# Altium PCB Digital.PcbDoc
Units mil, origin at the board's own origin, x right, y up, seen from the top; angles counter-clockwise.
Board outline 2755 x 2460 mil, 4 copper layers (Top Layer, Power, Ground, Bottom Layer), stack 30.634 mil thick; 74 components, 58 nets, 442 pads, 198 vias.
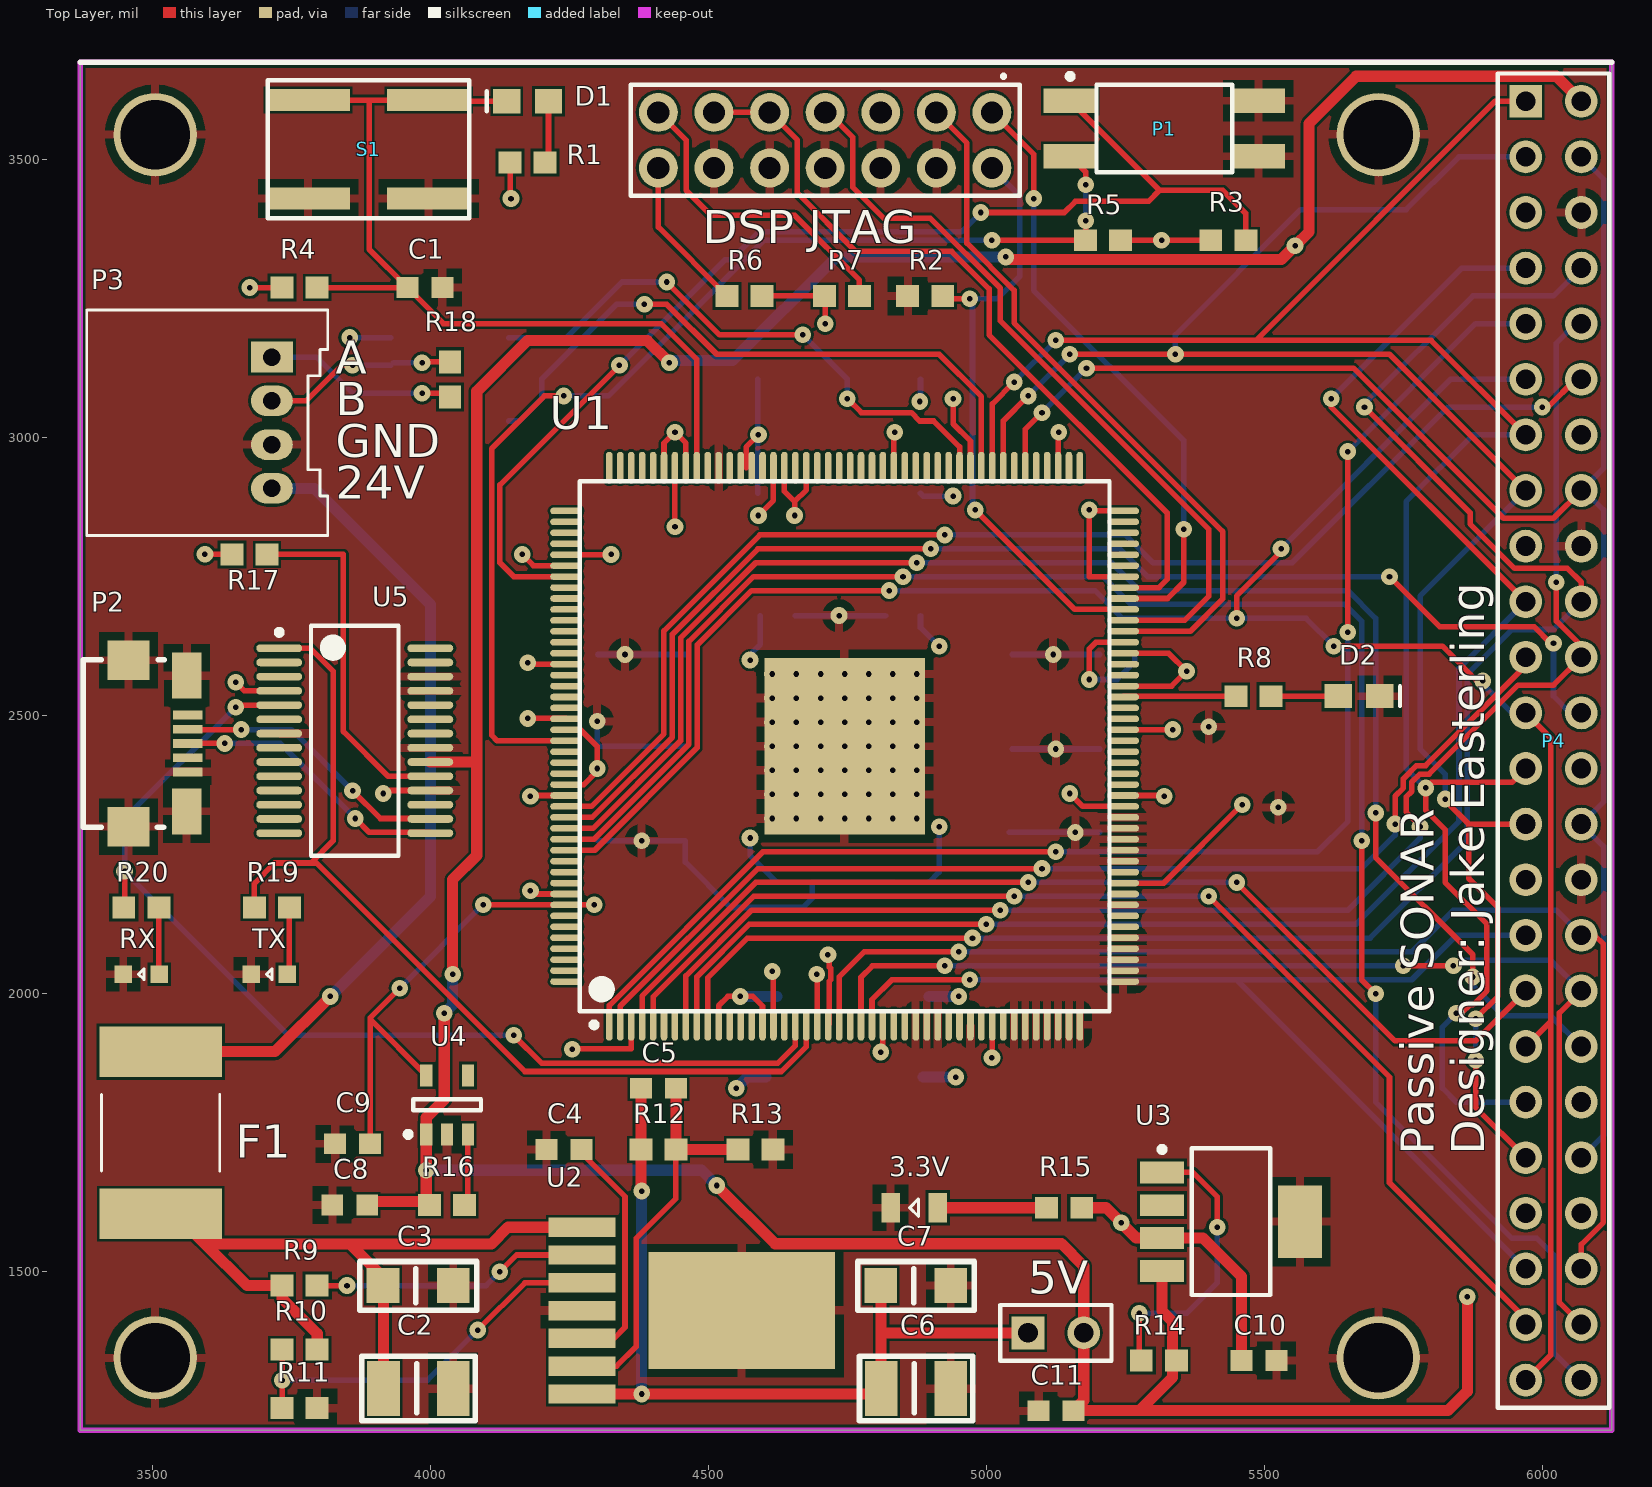
[diagram p0: Top Layer view]
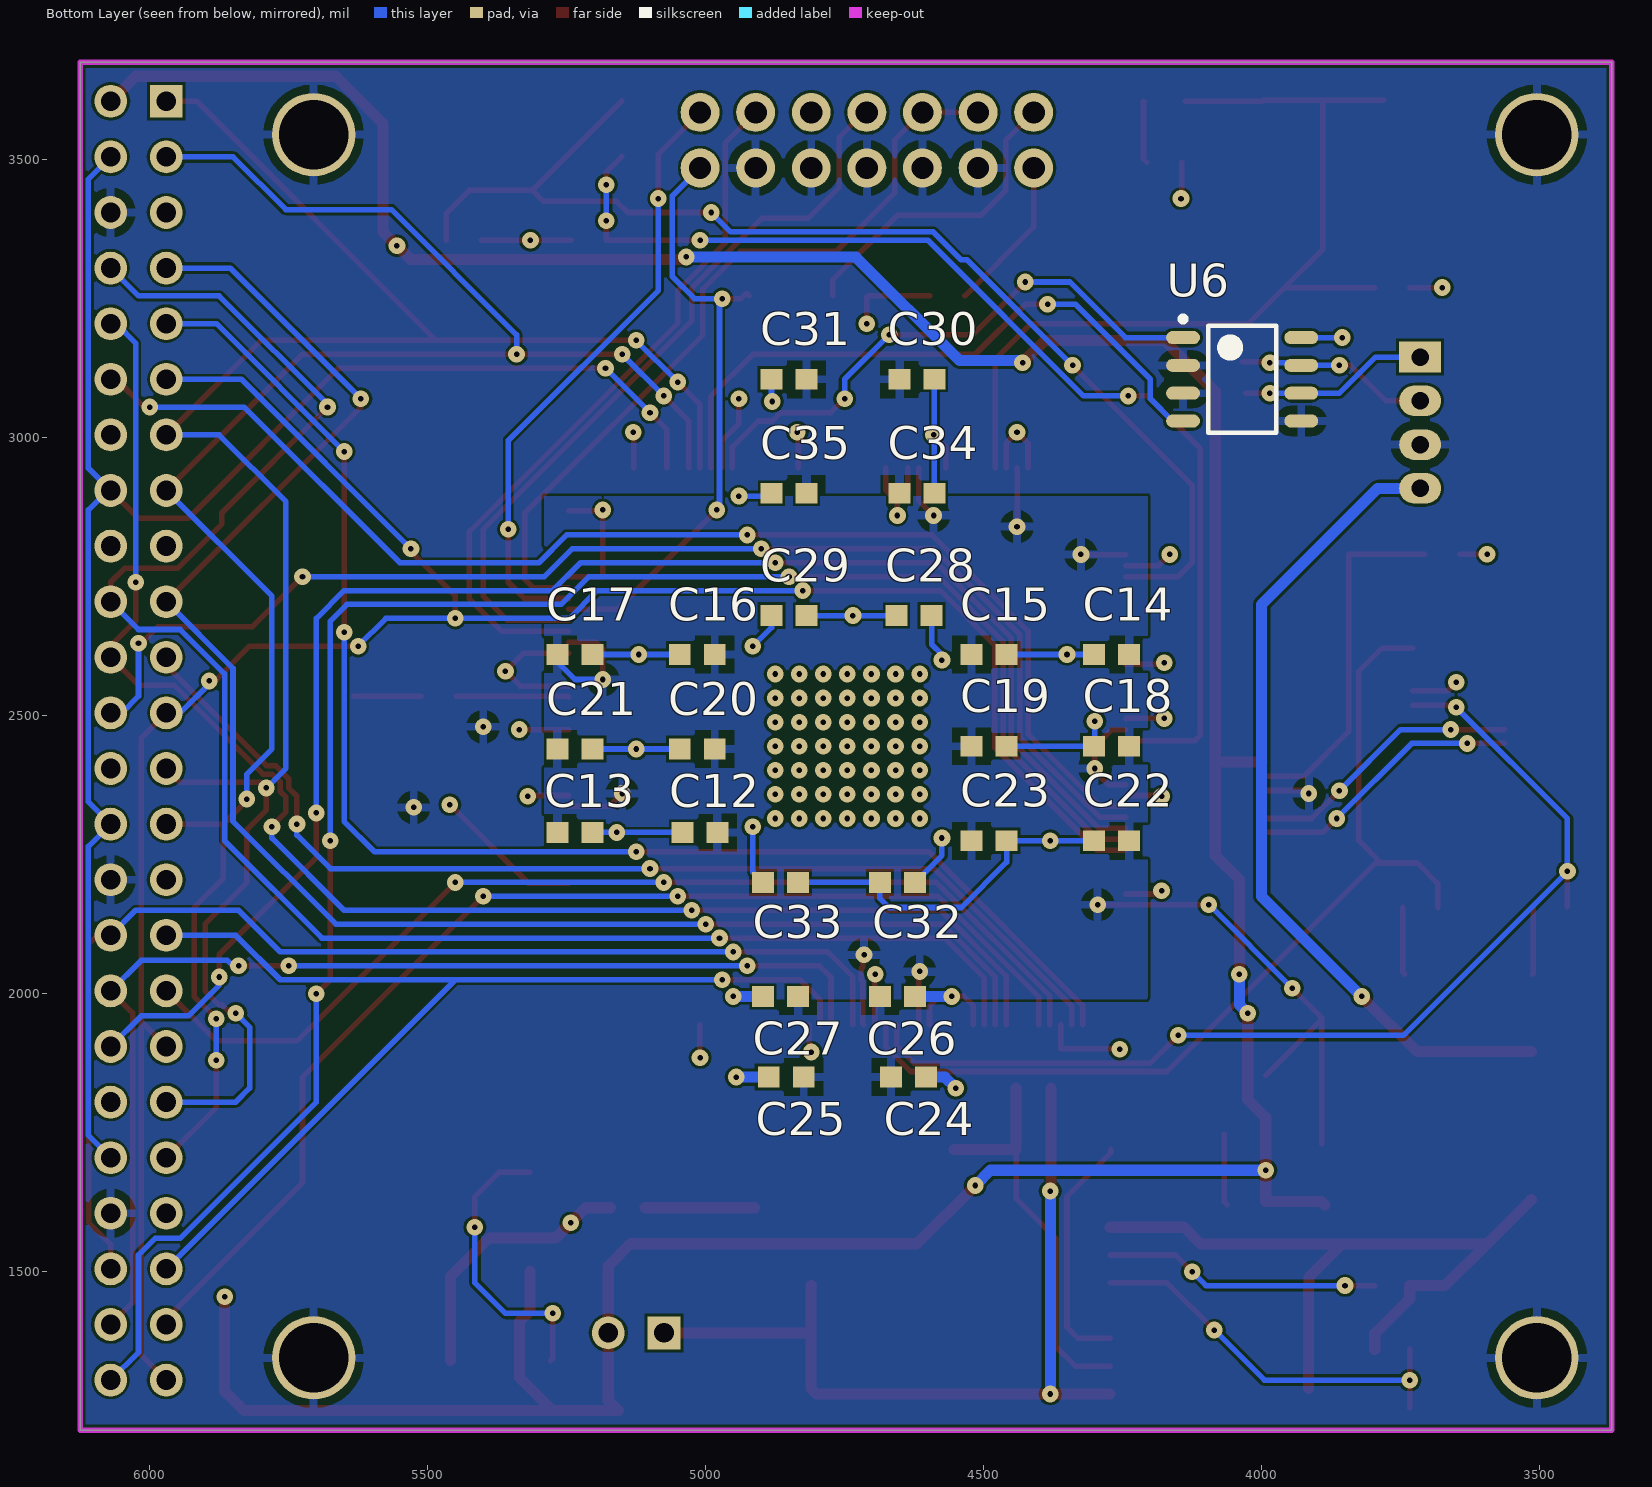
[diagram p1: Bottom Layer view, seen from below]
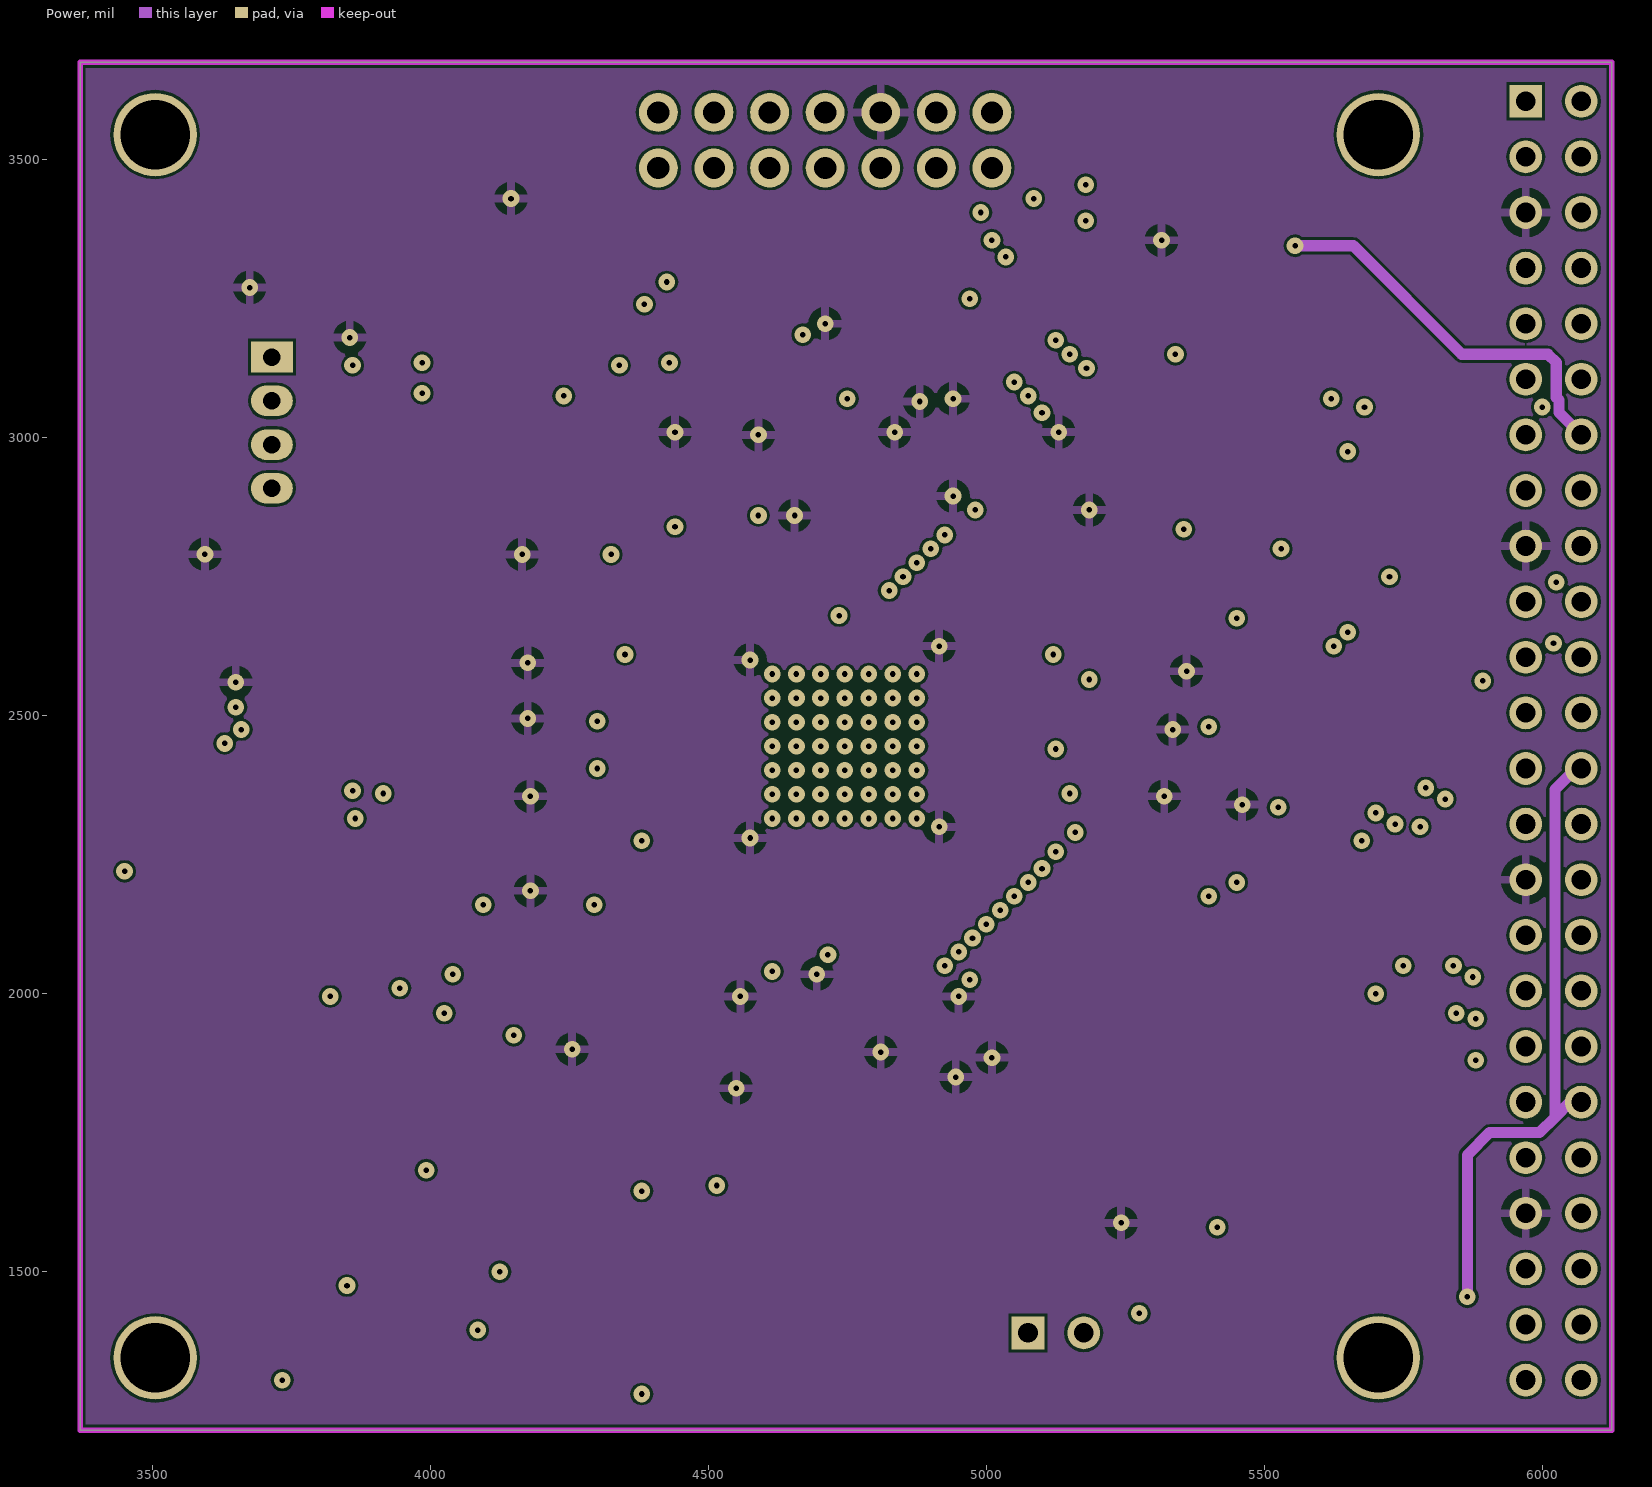
[diagram p2: Power]
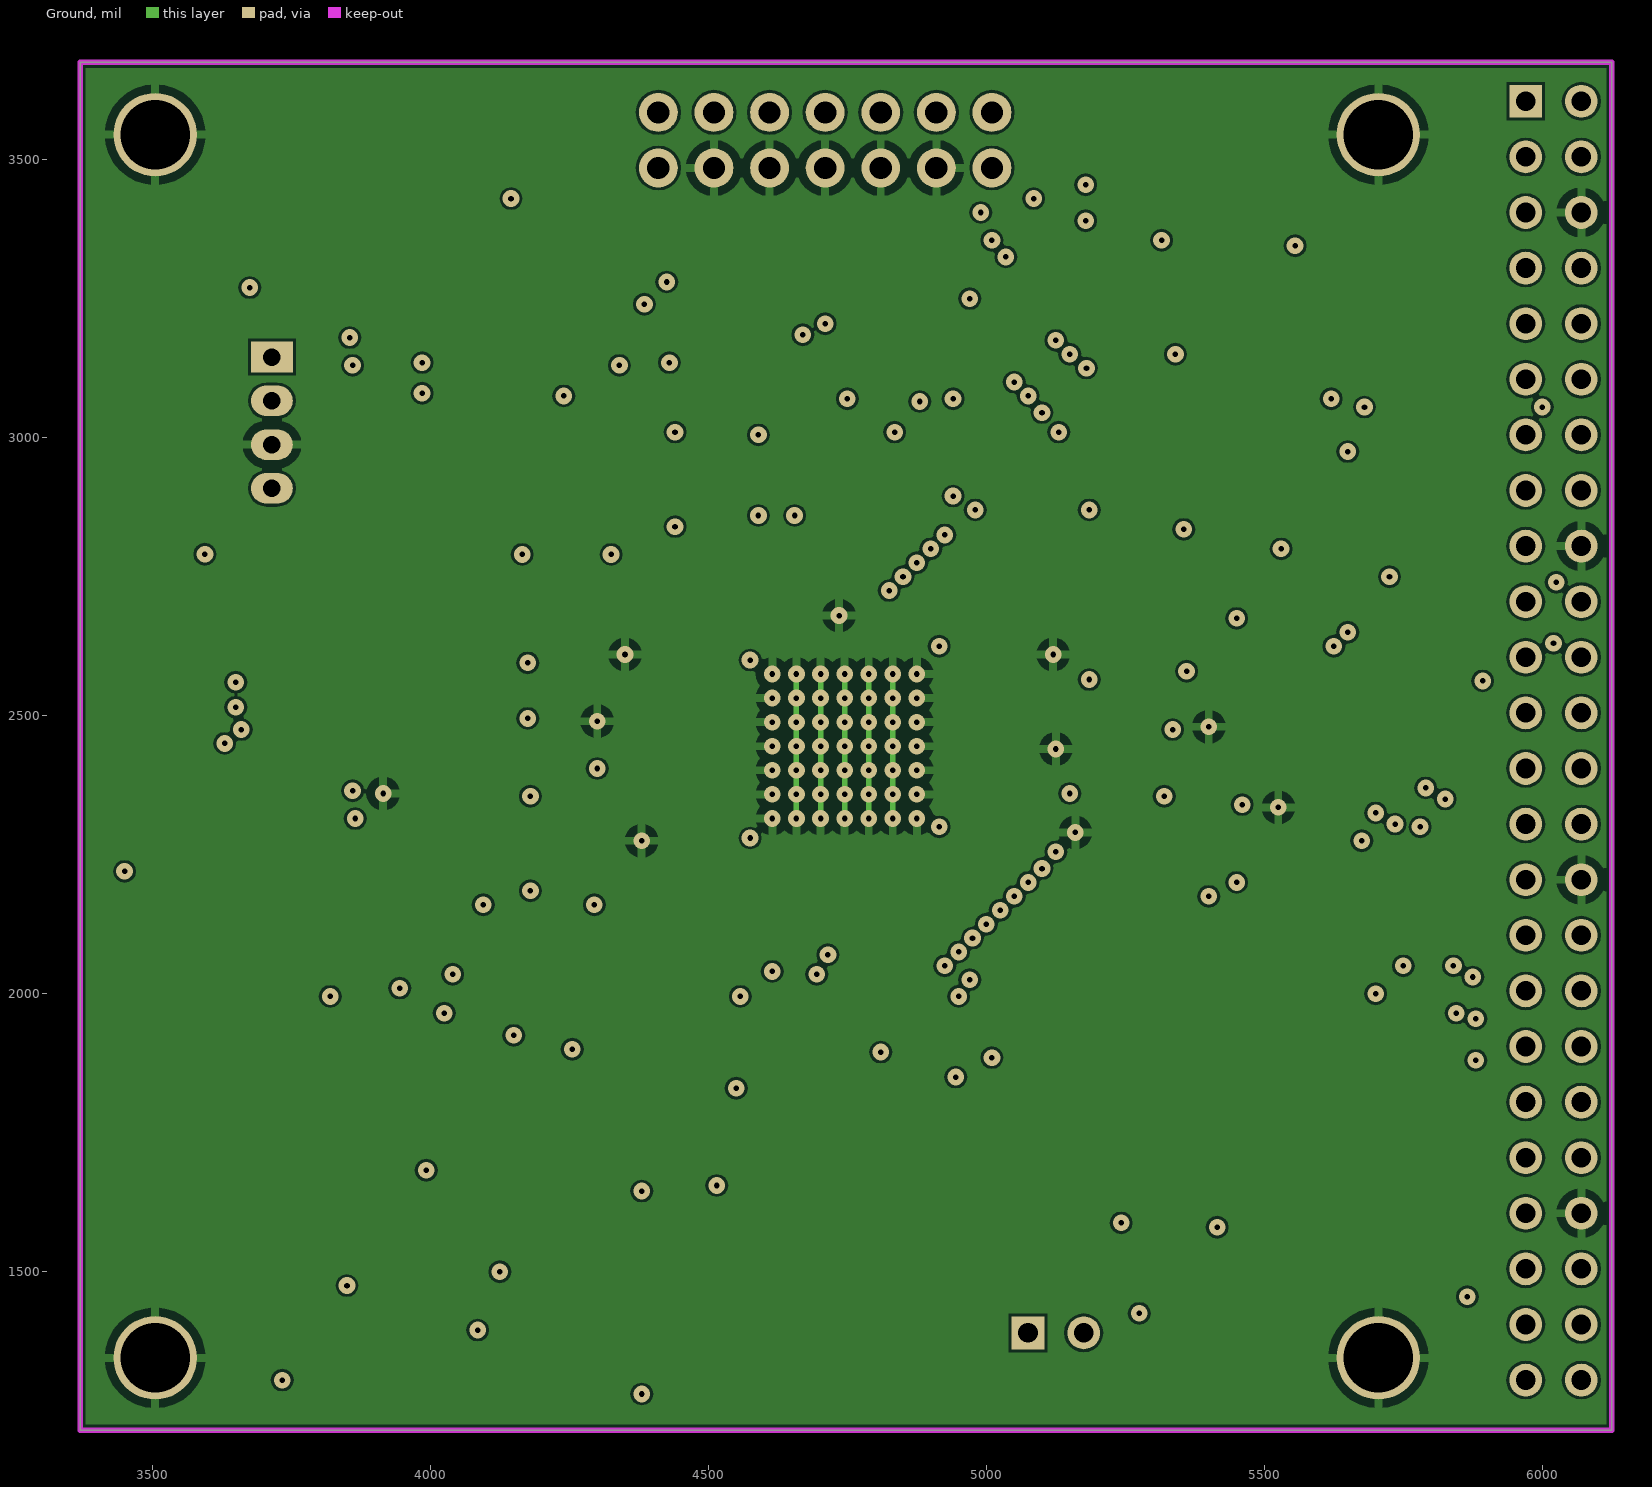
[diagram p3: Ground]

## Layer stack, top to bottom
Top Solder: solder mask 0.4, Solder Resist, Dk 3.5
Top Layer: signal copper 1.4
Dielectric 1: core 10, FR-4, Dk 4.2
Power: signal copper 1.417
Dielectric 3: prepreg 5, Dk 4.2
Ground: signal copper 1.417
Dielectric 2: core 10, Dk 4.2
Bottom Layer: signal copper 1.4
Bottom Solder: solder mask 0.4, Solder Resist, Dk 3.5

## Board outline
3370,1215 6125,1215 6125,3675 3370,3675

## Design rules (kind name [scope] priority, off if disabled: settings)
Clearance [All] p1: gap=5
DiffPairsRouting [All] p1: maxlimit=10 minlimit=10 mostfreqgap=10 toplayer_minwidth=10 toplayer_maxwidth=15 toplayer_prefwidth=15 midlayer1_minwidth=10 midlayer1_maxwidth=15 midlayer1_prefwidth=15 midlayer2_minwidth=10 midlayer2_maxwidth=15 midlayer2_prefwidth=15 bottomlayer_minwidth=10 bottomlayer_maxwidth=15 bottomlayer_prefwidth=15 maxuncoupledlength=500
HoleSize [All] p1: absolutevalues=TRUE maxlimit=125 minlimit=1 maxpercent=80.000 minpercent=20.000
PolygonConnect [All] p1: connectstyle=Relief reliefconductorwidth=15 reliefentries=4 polygonreliefangle="90 Angle" airgapwidth=15
RoutingVias [All] p1: holewidth=15 width=25 viastyle="Through Hole" minholewidth=15 minwidth=25 maxholewidth=25 maxwidth=35
SolderMaskExpansion [All] p1: expansion=4
Width [All] p1: maxlimit=20 minlimit=10 preferedwidth=10
28 further rules are at their usual default settings.

## Classes and differential pairs
component class U_RS485: P3 R18 U6
net class EOC[1..4]: EOC1 EOC2 EOC3 EOC4
net class DGround: DGND
component class U_USB: P2 R17 R19 R20 RX TX U5
component class U_Power: 3.3V 5V C2 C3 C4 C5 C6 C7 C8 C9 C10 C11 F1 R9 R10 R11 R12 R13 R14 R15 R16 U2 U3 U4
component class U_DSP: C1 C12 C13 C14 C15 C16 C17 C18 C19 C20 C21 C22 C23 C24 C25 C26 C27 C28 C29 C30 C31 C32 C33 C34 C35 D1 D2 "DSP JTAG" P1 R1 R2 R3 R4 R5 R6 R7 R8 S1 U1
component class Top_Level: P4
differential pair USB: +USB_P -USB_N

## Components (designator, comment, footprint, x,y, rotation, side; value= is the part's Value field where it differs from the comment)
3.3V "LED" LED0805 4870,1615 r180 top (schematic designator D3)
5V "Header 2" HDR1X2 5075,1390 r0 top
C1 "Cap" CAPC0603 3990,3270 r0 top
C2 "CAP1210" CAP1210 3915,1290 r180 top
C3 "Cap1206" CAP1206 3915,1475 r180 top
C4 "Cap" CAPC0603 4240,1720 r0 top
C5 "Cap" CAPC0603 4410,1830 r180 top
C6 "CAP1210" CAP1210 4810,1290 r180 top
C7 "Cap1206" CAP1206 4810,1475 r180 top
C8 "Cap1206" CAPC0603 3855,1620 r180 top
C9 "Cap1206" CAPC0603 3860,1730 r180 top
C10 "Cap1206" CAPC0603 5490,1340 r0 top
C11 "Cap1206" CAPC0603 5125,1250 r180 top
C12 "Cap" CAPC0603 5010,2290 r0 bottom
C13 "Cap" CAPC0603 5235,2290 r180 bottom
C14 "Cap" CAPC0603 4270,2610 r0 bottom
C15 "Cap" CAPC0603 4490,2610 r180 bottom
C16 "Cap" CAPC0603 5015,2610 r0 bottom
C17 "Cap" CAPC0603 5235,2610 r180 bottom
C18 "Cap" CAPC0603 4270,2445 r0 bottom
C19 "Cap" CAPC0603 4490,2445 r180 bottom
C20 "Cap" CAPC0603 5015,2440 r0 bottom
C21 "Cap" CAPC0603 5235,2440 r180 bottom
C22 "Cap" CAPC0603 4270,2275 r0 bottom
C23 "Cap" CAPC0603 4490,2275 r180 bottom
C24 "Cap" CAPC0603 4635,1850 r0 bottom
C25 "Cap" CAPC0603 4855,1850 r180 bottom
C26 "Cap" CAPC0603 4655,1995 r0 bottom
C27 "Cap" CAPC0603 4865,1995 r180 bottom
C28 "Cap" CAPC0603 4625,2680 r0 bottom
C29 "Cap" CAPC0603 4850,2680 r180 bottom
C30 "Cap" CAPC0603 4620,3105 r0 bottom
C31 "Cap" CAPC0603 4850,3105 r180 bottom
C32 "Cap" CAPC0603 4655,2200 r0 bottom
C33 "Cap" CAPC0603 4865,2200 r180 bottom
C34 "Cap" CAPC0603 4620,2900 r0 bottom
C35 "Cap" CAPC0603 4850,2900 r180 bottom
D1 "LED-RED" LED0805-RED 4175,3605 r0 top
D2 "LED-RED" LED0805-RED 5670,2535 r180 top
"DSP JTAG" "JTAG HEADER" "JTAG HEADER - 14" 5010,3585 r180 top
F1 "PTC Fuse" PTC7451X11N 3515,1750 r270 top
P1 "219-2LPST" SPST-4N 5320,3555 r0 top
P2 "USB Micro" 10118192-0001LF 3585,2450 r270 top
P3 "MOLEX-HDR-1x4-SHERLOCK_RA" MOLEX-HDR-1X4-SHERLOCK-RA 3715,3145 r90 top
P4 "Header 24X2" HDR2X24 5970,3605 r270 top
R1 "Res" RES0603 4175,3495 r0 top
R2 "Res" RES0603 4890,3255 r0 top
R3 "Res" RES0603 5435,3355 r180 top
R4 "Res" RES0603 3765,3270 r0 top
R5 "Res" RES0603 5210,3355 r0 top
R6 "Res" RES0603 4565,3255 r180 top
R7 "Res" RES0603 4740,3255 r0 top
R8 "Res" RES0603 5480,2535 r0 top
R9 "Res" RES0603 3765,1475 r0 top
R10 "Res" RES0603 3765,1360 r180 top
R11 "Res" RES0603 3765,1255 r0 top
R12 "Res" RES0603 4410,1720 r0 top
R13 "Res" RES0603 4585,1720 r0 top
R14 "Res" RES0603 5310,1340 r180 top
R15 "Res" RES0603 5140,1615 r180 top
R16 "Res" RES0603 4030,1620 r0 top
R17 "Res" RES0603 3675,2790 r0 top
R18 "Res" RES0603 4035,3105 r270 top
R19 "Res" RES0603 3715,2155 r0 top
R20 "Res" RES0603 3480,2155 r0 top
RX "LED" LED0603 3480,2035 r180 top
S1 "PBSW" PBSW 3790,3430 r0 top
TX "LED" LED0603 3710,2035 r180 top
U1 "TMS320f28379S" PQFP-177N 4745,2445 r90 top
U2 "LMZ14201h" TO-PMOD-7 4560,1430 r270 top
U3 "3.3V LDO REG" SOT223-8N 5440,1590 r0 top
U4 "TLV70212DBVR" SOT23-5N 4030,1800 r90 top
U5 "FT232RL" SSOP_28_N 3865,2455 r0 top
U6 "MAX14840EASA+" MAX14840EASA+ 4035,3105 r180 bottom

## Footprints (in the part's own frame and the unit in brackets; to place one, negate y for a bottom-side part, rotate by r counter-clockwise, add the part's x,y. Pads: shape width x height; smd on the part's side, far side on the other; paste and mask are expansions set on the pad)
10118192-0001LF [mm] "USB Micro-B Recepticle"
  rect 0.4x1.35 smd: 1(-1.3,-0.533) 2(-0.65,-0.533) 3(0,-0.533) 4(0.65,-0.533) 5(1.3,-0.533)
  rect 1.8x1.9 smd: SHD(-3.8,-3.248) SHD(3.8,-3.248)
  rect 2.1x1.35 smd: SHD(-3.1,-0.584) SHD(3.1,-0.598)
  silkscreen extent -3.83,-5.33 3.83,-1.63, body extent -3.96,-5.98 3.96,-0.32, height 3.09
CAP1206 [mm]
  rect 1.5x1.6 smd: 1(0,0) 2(-3.2,0)
  silkscreen extent -4.27,-1.1 1.06,1.13, body extent -3.2,-0.9 0.02,0.9, height 1.6
CAP1210 [mm]
  rect 1.5x2.5 smd: 1(-0.02,0) 2(-3.2,0)
  silkscreen extent -4.2,-1.48 0.97,1.48, body extent -3.22,-1.25 0,1.26, height 2.5
CAPC0603 [mm] "Chip Capacitor, 2-Leads, Body 1.60x0.80mm, IPC Medium Density"
  rect 1x0.95 smd: 1(-0.8,0) 2(0.8,0)
  body extent -0.88,-0.48 0.87,0.48, height 0.8
HDR1X2 [mm] "Connector; Header; 2 Position"
  rect 1.5x1.5 hole 0.9: 1(0,0)
  round 1.5 hole 0.9: 2(2.54,0)
  silkscreen extent -1.27,-1.27 3.81,1.27
HDR2X24 [mm] "Connector; Header; 24x2 Position"
  rect 1.5x1.5 hole 0.9: 1(0,0)
  round 1.5 hole 0.9: 2(0,2.54) 3(2.54,0) 4(2.54,2.54) 5(5.08,0) 6(5.08,2.54) 7(7.62,0) 8(7.62,2.54) 9(10.16,0) 10(10.16,2.54) 11(12.7,0) 12(12.7,2.54) 13(15.24,0) 14(15.24,2.54) 15(17.78,0) 16(17.78,2.54) 17(20.32,0) 18(20.32,2.54) 19(22.86,0) 20(22.86,2.54) 21(25.4,0) 22(25.4,2.54) 23(27.94,0) 24(27.94,2.54) 25(30.48,0) 26(30.48,2.54) 27(33.02,0) 28(33.02,2.54) 29(35.56,0) 30(35.56,2.54) 31(38.1,0) 32(38.1,2.54) 33(40.64,0) 34(40.64,2.54) 35(43.18,0) 36(43.18,2.54) 37(45.72,0) 38(45.72,2.54) 39(48.26,0) 40(48.26,2.54) 41(50.8,0) 42(50.8,2.54) 43(53.34,0) 44(53.34,2.54) 45(55.88,0) 46(55.88,2.54) 47(58.42,0) 48(58.42,2.54)
  silkscreen extent -1.27,-1.27 59.69,3.81
"JTAG HEADER - 14" [mil]
  round 70 hole 40: 1(0,0) 2(0,100) 3(100,0) 4(100,100) 5(200,0) 6(200,100) 7(300,0) 8(300,100) 9(400,0) 10(400,100) 11(500,0) 12(500,100) 13(600,0) 14(600,100)
  silkscreen extent -50,-66 650,150, body extent -50,-50 650,150, height 234
LED0603 [mm] "Chip LED, 2-Leads, Body 1.60x0.80mm, IPC Medium Density"
  rect 0.8x0.8 smd: A(-0.825,0) C(0.825,0)
  silkscreen extent -0.13,-0.25 0.12,0.25, body extent -0.88,-0.48 0.87,0.47, height 0.8
LED0805 [mm] "Chip LED, 2-Leads, Body 2.00x1.25mm, IPC Medium Density"
  rect 0.85x1.35 smd: A(-1.075,0) C(1.075,0)
  silkscreen extent -0.2,-0.4 0.2,0.4, body extent -1,-0.63 1,0.63, height 0.75
LED0805-RED [mm] "Molded Diode, 2-Leads, Body 2.0x1.3mm, IPC Medium Density"
  rect 1.25x1.1 smd: 1(-0.95,0) 2(0.95,0)
  silkscreen extent -1.88,-0.45 -1.88,0.45, body extent -1.01,-0.62 1.01,0.63, height 1.1
MAX14840EASA+ [mm] "SOIC, 8-Leads, Body 4.90x3.90mm, Pitch 1.27mm, IPC Medium Density"
  oval 1.55x0.6 smd: 1(-2.7,1.905) 2(-2.7,0.635) 3(-2.7,-0.635) 4(-2.7,-1.905) 5(2.7,-1.905) 6(2.7,-0.635) 7(2.7,0.635) 8(2.7,1.905)
  silkscreen extent -2.83,-2.45 1.55,2.88, body extent -1.95,-2.45 1.95,2.45, height 1.75
MOLEX-HDR-1X4-SHERLOCK-RA [mm]
  rect 1.397x1.905 hole 0.8: 1(0,0)
  oval 1.397x1.905 hole 0.8: 2(-2,0) 3(-4,0) 4(-6,0)
  silkscreen extent -8.15,-2.55 2.15,8.46, body extent -8.17,-1.98 2.13,8.52, height 5.54
PBSW [mm]
  rect 3.81x1 smd: 1(-0.254,0) 2(5.254,0) 3(5.254,4.5)
  rect 3.835x1 smd: 4(-0.254,4.5)
  silkscreen extent -2.1,-0.9 7.1,5.4, body extent -2,-0.75 7,5.25, height 5
PQFP-177N [mm] "TSQFP, 176-Leads, Body 24.00x24.00mm, Pitch 0.50mm, Thermal Pad 8.07x7.33mm, IPC Medium Density"
  oval 1.45x0.3 smd: 1(-12.725,10.75) 2(-12.725,10.25) 3(-12.725,9.75) 4(-12.725,9.25) 5(-12.725,8.75) 6(-12.725,8.25) 7(-12.725,7.75) 8(-12.725,7.25) 9(-12.725,6.75) 10(-12.725,6.25) 11(-12.725,5.75) 12(-12.725,5.25) 13(-12.725,4.75) 14(-12.725,4.25) 15(-12.725,3.75) 16(-12.725,3.25) 17(-12.725,2.75) 18(-12.725,2.25) 19(-12.725,1.75) 20(-12.725,1.25) 21(-12.725,0.75) 22(-12.725,0.25) 23(-12.725,-0.25) 24(-12.725,-0.75) 25(-12.725,-1.25) 26(-12.725,-1.75) 27(-12.725,-2.25) 28(-12.725,-2.75) 29(-12.725,-3.25) 30(-12.725,-3.75) 31(-12.725,-4.25) 32(-12.725,-4.75) 33(-12.725,-5.25) 34(-12.725,-5.75) 35(-12.725,-6.25) 36(-12.725,-6.75) 37(-12.725,-7.25) 38(-12.725,-7.75) 39(-12.725,-8.25) 40(-12.725,-8.75) 41(-12.725,-9.25) 42(-12.725,-9.75) 43(-12.725,-10.25) 44(-12.725,-10.75) 89(12.725,-10.75) 90(12.725,-10.25) 91(12.725,-9.75) 92(12.725,-9.25) 93(12.725,-8.75) 94(12.725,-8.25) 95(12.725,-7.75) 96(12.725,-7.25) 97(12.725,-6.75) 98(12.725,-6.25) 99(12.725,-5.75) 100(12.725,-5.25) 101(12.725,-4.75) 102(12.725,-4.25) 103(12.725,-3.75) 104(12.725,-3.25) 105(12.725,-2.75) 106(12.725,-2.25) 107(12.725,-1.75) 108(12.725,-1.25) 109(12.725,-0.75) 110(12.725,-0.25) 111(12.725,0.25) 112(12.725,0.75) 113(12.725,1.25) 114(12.725,1.75) 115(12.725,2.25) 116(12.725,2.75) 117(12.725,3.25) 118(12.725,3.75) 119(12.725,4.25) 120(12.725,4.75) 121(12.725,5.25) 122(12.725,5.75) 123(12.725,6.25) 124(12.725,6.75) 125(12.725,7.25) 126(12.725,7.75) 127(12.725,8.25) 128(12.725,8.75) 129(12.725,9.25) 130(12.725,9.75) 131(12.725,10.25) 132(12.725,10.75)
  oval 0.3x1.45 smd: 45(-10.75,-12.725) 46(-10.25,-12.725) 47(-9.75,-12.725) 48(-9.25,-12.725) 49(-8.75,-12.725) 50(-8.25,-12.725) 51(-7.75,-12.725) 52(-7.25,-12.725) 53(-6.75,-12.725) 54(-6.25,-12.725) 55(-5.75,-12.725) 56(-5.25,-12.725) 57(-4.75,-12.725) 58(-4.25,-12.725) 59(-3.75,-12.725) 60(-3.25,-12.725) 61(-2.75,-12.725) 62(-2.25,-12.725) 63(-1.75,-12.725) 64(-1.25,-12.725) 65(-0.75,-12.725) 66(-0.25,-12.725) 67(0.25,-12.725) 68(0.75,-12.725) 69(1.25,-12.725) 70(1.75,-12.725) 71(2.25,-12.725) 72(2.75,-12.725) 73(3.25,-12.725) 74(3.75,-12.725) 75(4.25,-12.725) 76(4.75,-12.725) 77(5.25,-12.725) 78(5.75,-12.725) 79(6.25,-12.725) 80(6.75,-12.725) 81(7.25,-12.725) 82(7.75,-12.725) 83(8.25,-12.725) 84(8.75,-12.725) 85(9.25,-12.725) 86(9.75,-12.725) 87(10.25,-12.725) 88(10.75,-12.725) 133(10.75,12.725) 134(10.25,12.725) 135(9.75,12.725) 136(9.25,12.725) 137(8.75,12.725) 138(8.25,12.725) 139(7.75,12.725) 140(7.25,12.725) 141(6.75,12.725) 142(6.25,12.725) 143(5.75,12.725) 144(5.25,12.725) 145(4.75,12.725) 146(4.25,12.725) 147(3.75,12.725) 148(3.25,12.725) 149(2.75,12.725) 150(2.25,12.725) 151(1.75,12.725) 152(1.25,12.725) 153(0.75,12.725) 154(0.25,12.725) 155(-0.25,12.725) 156(-0.75,12.725) 157(-1.25,12.725) 158(-1.75,12.725) 159(-2.25,12.725) 160(-2.75,12.725) 161(-3.25,12.725) 162(-3.75,12.725) 163(-4.25,12.725) 164(-4.75,12.725) 165(-5.25,12.725) 166(-5.75,12.725) 167(-6.25,12.725) 168(-6.75,12.725) 169(-7.25,12.725) 170(-7.75,12.725) 171(-8.25,12.725) 172(-8.75,12.725) 173(-9.25,12.725) 174(-9.75,12.725) 175(-10.25,12.725) 176(-10.75,12.725)
  rect 8.07x7.33 smd: 177(0,0)
  silkscreen extent -12.85,-12.1 12.1,12.1, body extent -12,-12 12,12, height 1.45
PTC7451X11N [mm] "Chip PTC, 2920, 7351 metric 2-Leads, Body 7.36x5.12mm, IPC Medium Density"
  rect 2.3x5.6 smd: 1(-3.7,0) 2(3.7,0)
  silkscreen extent -1.75,-2.7 1.75,2.7, body extent -3.99,-2.72 3.99,2.72, height 1.15
RES0603 [mm] "Chip Resistor, 2-Leads, Body 1.60x0.80mm, IPC Medium Density"
  rect 1.05x1 smd: 1(-0.8,0) 2(0.8,0)
  body extent -0.88,-0.48 0.87,0.47, height 0.8
SOT23-5N [mm] "For LP5907"
  rect 1x0.55 smd: 1(-1.35,0.95) 2(-1.35,0) 3(-1.35,-0.95) 4(1.35,-0.95) 5(1.35,0.95)
  silkscreen extent -1.47,-1.55 0.25,1.9, body extent -0.87,-1.52 0.87,1.53, height 1.45
SOT223-8N [mm] "3.3V LDO"
  rect 2x1 smd: 1(-3.15,2.25) 2(-3.15,0.75) 3(-3.15,-0.75) 4(-3.15,-2.25)
  rect 2x3.3 smd: 5(3.15,0)
  silkscreen extent -3.27,-3.35 1.8,3.42, body extent -1.85,-3.35 1.85,3.35, height 1.8
SPST-4N [mm] "For SPST-4DIP"
  rect 2.44x1.13 smd: 1(-4.3,1.295) 2(-4.3,-1.245) 3(4.3,-1.245) 4(4.3,1.295)
  silkscreen extent -4.42,-1.97 3.1,2.53, body extent -3.5,-1.97 3.5,2.03, height 3.8
SSOP_28_N [mm] "For FT232RL-Tube"
  oval 2.1x0.35 smd: 1(-3.475,4.225) 2(-3.475,3.575) 3(-3.475,2.925) 4(-3.475,2.275) 5(-3.475,1.625) 6(-3.475,0.975) 7(-3.475,0.325) 8(-3.475,-0.325) 9(-3.475,-0.975) 10(-3.475,-1.625) 11(-3.475,-2.275) 12(-3.475,-2.925) 13(-3.475,-3.575) 14(-3.475,-4.225) 15(3.425,-4.225) 16(3.425,-3.575) 17(3.425,-2.925) 18(3.425,-2.275) 19(3.425,-1.625) 20(3.425,-0.975) 21(3.425,-0.325) 22(3.425,0.325) 23(3.425,0.975) 24(3.425,1.625) 25(3.425,2.275) 26(3.425,2.925) 27(3.425,3.575) 28(3.425,4.225)
  silkscreen extent -3.6,-5.25 1.97,5.25, body extent -2.83,-5.25 2.77,5.25, height 2
TO-PMOD-7 [mm] "For LMZ14201h"
  rect 0.89x3.06 smd: 1(-3.81,-7.305) 2(-2.54,-7.305) 3(-1.27,-7.305) 4(0,-7.305) 5(1.27,-7.305) 6(2.54,-7.305) 7(3.81,-7.305)
  rect 5.35x8.54 smd: 8(0,0)
  body extent -4.83,-5.74 4.9,4.41, height 5

## Part data
5V: "Header, 2-Pin"
C2 C6: "CAP CER 10UF 50V 20% X5R 1210"
C3 C7 C8 C9 C10 C11: "CAP CER 1UF 50V 10% X7R 1206"
D1 D2: "Light Emitting Diode - RED"
"DSP JTAG": library part JTAG-TI_14, "14 Pin JTAG Header"
F1: library part PTC_Fuse
P1: library part SPST-2DIP-SW, "SWITCH TAPE SEAL 2 POS SMD 50V"
P2: "USB Mini B Metal Shield SMT"
P3: "Header, Molex, 2mm Pitch Sherlock Header, Single Row, Horizontal, 4 Circuits, Length 3.3mm"
P4: "Header, 24-Pin, Dual row"
S1: library part SW-PB, "Push Button Switch"
U1: "IC MCU 200MHZ FPU DSP"
U2: "IC BUCK SYNC ADJ 1A TO-PMOD-7"
U3: library part LP38691, "IC REG LDO 3.3V 0.5A SOT223-5"
U4: "IC REG LDO 1.2V 0.3A SOT23-5"
U5: "IC USB FS SERIAL UART 28-SSOP"
U6: "TXRX 40MBPS RS485/RS422 8-SOIC"

## Free pads (board coordinates)
  round 150 hole 125: 0(3505,1345) 0(3505,3545) 0(5705,1345) 0(5705,3545)

## Via types
v1: diameter 30, hole 10, Top Layer to Bottom Layer, tented both sides, 149 vias
v2: diameter 30, hole 10, Top Layer to Bottom Layer, 49 vias

## Nets (pads, with @x,y where several pads share a name; then routed paths per layer and width w, separated by ;. In a path a pad name is that pad's centre, name@x,y a point inside that pad or via, vN(x,y) a via of type N, cw(c..) or ccw(c..) an arc to the next point about the centre after c; other vN are vias at no path point)
1: 
1.2VD: C9.1 C12.1 C13.1 C14.1 C15.1 C16.1 C17.1 C18.1 C19.1 C20.1 C21.1 C22.1 C23.1 U1.16 U1.21 U1.61 U1.76 U1.117 U1.126 U1.137 U1.153 U1.158 U1.169 U4.5 | length 1879.6
  Top Layer w10: C9.1 3891.5,1954.25 ; v1(3945,2010) 3891.5,1956.5 3891.5,1954.25 ; U4.5 3891.5,1954.25 ; v1(4095,2160) 4243.58,2160 U1.169 v1@4294.57,2159.57 ; U1.158 4276.1,2376.1 4300,2400 4300,2445 4270.47,2474.53 U1.153 ; U1.137 v1@4324.49,2789.49 ; v1@4439.88,2840.12 U1.126 ; v1(4590,2860) 4617.05,2887.05 U1.117 ; U1.16 v1@4617.05,2042.95 ; U1.21 4717.5,1946.04 4717.5,2022.14 4720,2024.64 4720,2045.36 4717.5,2047.86 v1@4717.5,2067.5 ; v1(5150,2360) 5173.27,2336.73 U1.61 ; v1(5185,2565) 5185,2620 5197.01,2632.01 U1.76
  Bottom Layer w10: v1(3945,2010) v1(4095,2160) ; v1(5185,2565) 5235,2565 5266.5,2596.5 C17.1
  other v1: 4615,2040 4715,2070 4295,2160 4300,2405 4325,2790 4440,2840
3: 
3.3VD: "DSP JTAG.5" C10.1 C24.1 C25.1 C26.1 C27.1 C28.1 C29.1 C30.1 C31.1 C32.1 C33.1 C34.1 C35.1 P4.5 P4.17 P4.29 P4.41 R1.1 R3.2 R4.1 R5.2 R6.1 R7.1 R15.1 R17.1 U1.3 U1.11 U1.15 U1.20 U1.26 U1.36 U1.54 U1.62 U1.68 U1.72 U1.75 U1.82 U1.88 U1.91 U1.99 U1.106 U1.114 U1.116 U1.119 U1.120 U1.125 U1.127 U1.138 U1.147 U1.152 U1.159 U1.168 U3.3 U5.4 U6.8 | length 4480.4
  Top Layer w10: v1@3595,2790 R17.1 ; v1(3650,2560) 3665.43,2544.57 U5.4 ; v1(3675,3270) R4.1 ; v1@4143.5,3431.5 R1.1 ; v1(4165,2790) 4185.2,2769.8 U1.138 ; v1(4175,2495) 4243.23,2495 U1.152 ; v1@4177.36,2592.64 U1.147 ; v1@4181.42,2356.42 U1.159 ; v1@4185.75,2179.25 U1.168 ; v1@4251.14,1901.14 4361.14,1901.14 U1.3 ; U1.127 4420.2,2990.2 v1(4440,3010) 4459.57,2990.43 U1.125 ; U1.11 4518.62,1978.62 4535,1995 v1(4557.5,1995) 4580,1995 4597.36,1977.64 U1.15 ; 4567.83,2945.98 4567.83,2982.83 v1(4590,3005) ; R6.1 R7.1 4710,3253.5 v1(4710,3205) ; U1.116 4636.73,2903.27 4655,2885 ; v1(4655,2860) 4655,2885 ; U1.114 4676.1,2906.1 4655,2885 ; U1.20 v1@4695.79,2044.21 ; v1@4813.9,1895 U1.26 ; U1.106 v1@4833.58,3008.58 ; v1(4940,3070) 4940,3025 4971.38,2993.62 U1.99 ; v1@5010.75,1885.75 U1.36 ; U1.91 v1@5128.86,3008.86 ; v1(5185,2870) 5185,2750.12 U1.82 ; v1@5186.77,2868.23 U1.88 ; R5.2 R3.2 ; U1.54 5318.94,2198.94 v1(5460,2340) ; U1.62 v1@5318.58,2356.42 ; U1.68 v1@5334.53,2474.53 ; U1.72 5333.27,2553.27 v1(5360,2580) 5327.68,2612.32 U1.75
  Top Layer w20: R15.1 5215,1615 5269.53,1560.47 U3.3 5389.53,1560.47 5458.5,1491.5 C10.1
  Bottom Layer w10: v1(3855,3180) U6.8 ; v1(4575,2280) 4575,2248.5 C32.1 ; v1(4575,2600) 4575,2610 4593.5,2628.5 C28.1 ; C34.1 v1@4588.5,3003.5 ; C30.1 4588.5,3006.5 v1(4590,3005) ; C29.1 4881.5,2658.5 v1(4915,2625) ; C35.1 4886.5,2895 v1(4940,2895) ; v1@4881.5,3066.5 C31.1 ; C33.1 4915,2218.5 v1(4915,2300)
  Bottom Layer w20: v1(4550,1830) 4570,1850 C24.1 ; v1(4557.5,1995) C26.1 ; C25.1 v1(4945,1850) ; C27.1 v1(4950,1995)
  other v1: 5242.26,1587.74 5010,1885 4810,1895 4255,1900 4695,2035 4180,2185 4180,2355 5320,2355 5335,2475 4175,2595 3594.57,2790.43 4835,3010 5130,3010 4880,3065 5315,3355 4145,3430
5VD: 5V.2 C8.1 C11.1 P4.2 P4.14 P4.26 P4.38 R14.1 R16.1 U3.4 U4.1 U5.20 | length 8635.1
  Top Layer w20: C8.1 3892.4,1625.91 3992.6,1625.91 U4.1 3992.6,1777.6 4025,1810 v1(4025,1965) ; U5.20 4083.39,2416.61 ; v1(4040,2035) 4040,2205 4083.39,2248.39 4083.39,2416.61 ; v1(4430,3135) 4390,3175 4175,3175 4083.39,3083.39 4083.39,2416.61 ; v1(4515,1655) 4619.69,1550.32 5134.69,1550.32 5175,1510 5V.2 5175,1268.5 C11.1 5275,1250 ; v1(5035,3325) 5039.69,3320.31 5530.31,3320.31 v1(5555.16,3345.16) 5580,3370 5580,3565 5665,3650 6025,3650 P4.2 ; U3.4 5315.98,1429.02 5335,1410 5335,1310 5275,1250 ; v1(5865,1455) 5865,1285 5830,1250 5275,1250
  Power w20: v1(5555.16,3345.16) 5659.84,3345.16 5855,3150 6010,3150 6025,3135 6025,3072.43 6030,3067.43 6030,3045 P4.14 ; v1(5865,1455) 5865,1710 5905,1750 5995,1750 6022.5,1777.5 ; P4.38 6050,1805 6022.5,1777.5 ; P4.26 6060,2405 6022.5,2367.5 6022.5,1777.5
  Bottom Layer w20: v1(3992.5,1682.5) 4487.5,1682.5 v1(4515,1655) ; v1(4025,1965) 4040,1980 v1(4040,2035) ; v1(4430,3135) 4433.7,3138.7 4543.7,3138.7 4730,3325 v1(5035,3325)
5VD_1: 5V.1 C5.2 C6.1 C7.1 R12.1 U2.7 | length 1530.6
  Top Layer w20: U2.7 v1(4380,1280) 4800.79,1280 C6.1 4810.79,1390 ; v1@4378.5,1656.5 R12.1 C5.2 ; C7.1 4810.79,1474.21 4810.79,1390 ; 5V.1 4810.79,1390
  Bottom Layer w20: v1(4380,1280) v1(4380,1645)
ADC_CE1: P4.9 U1.1 | length 2580.6
  Top Layer w10: U1.1 4321.77,1979.05 4597.72,2255 v1(5125,2255) ; v1(5650,2650) v1(5650,2975)
  Bottom Layer w10: v1(5125,2255) 5595,2255 5650,2310 v1(5650,2650) ; v1(5650,2975) 5880,3205 P4.9
ADC_CE2: P4.21 U1.2 | length 1981.5
  Top Layer w10: U1.2 4341.46,1977.52 4588.93,2225 v1(5100,2225) ; v1(5735,2305) 5735,2355 5750,2370 5750,2386.57 5773.43,2410 5790,2410 5970,2590 P4.21
  Bottom Layer w10: v1(5100,2225) 5675,2225 5735,2285 v1(5735,2305)
ADC_CE3: P4.33 U1.4 | length 1880.8
  Top Layer w10: U1.4 4380.83,1995.68 4585.15,2200 v1(5075,2200) ; v1(5450,2200) 5735,1915 5880,1915 P4.33
  Bottom Layer w10: v1(5075,2200) v1(5450,2200)
ADC_CE4: P4.45 U1.5 | length 2130.6
  Top Layer w10: U1.5 4400.51,1994.15 4581.36,2175 v1(5050,2175) ; v1(5400,2175) 5725,1850 5725,1660 5970,1415 P4.45
  Bottom Layer w10: v1(5050,2175) v1(5400,2175)
BOOTMODE0: P1.2 R5.1 U1.154 | length 2039.6
  Top Layer w10: v1(4240,3075) 4205,3075 4110,2980 4110,2465 4120.16,2454.84 U1.154 ; v1(5010,3355) R5.1 v1(5178.5,3390) ; P1.2 5178.5,3478.19 v1(5178.5,3455)
  Bottom Layer w10: v1(4240,3075) 4320.36,3075 4600.36,3355 v1(5010,3355) ; v1(5178.5,3390) v1(5178.5,3455)
BOOTMODE1: P1.1 R3.1 U1.139 | length 2123.7
  Top Layer w10: U1.139 4149.88,2750.12 4125,2775 4125,2915 v1(4340,3130) ; v1(4990,3405) 5140,3405 5160,3425 5291.69,3425 5311.69,3445 ; P1.1 5311.69,3445 ; R3.1 5466.5,3403.5 5425,3445 5311.69,3445
  Bottom Layer w10: v1(4340,3130) 4530,3320 4540.61,3320 4590.61,3370 4955,3370 v1(4990,3405)
CONVST: P4.11 P4.23 P4.35 P4.47 U1.164 | length 4149.3
  Top Layer w10: U1.164 4295.57,2257.99 4480,2442.43 4480,2627.43 4577.57,2725 v1(4825,2725) ; v1(5450,2675) 5450,2715 5530,2795 v1(5530,2800) ; v1(5625,2625) 5820,2625 5882.5,2562.5 v1(5892.5,2562.5) ; P4.47 6015,1350 6015,2460 P4.23 ; P4.35 6015,1950
  Bottom Layer w10: v1(4825,2725) 5195,2725 5245,2675 v1(5450,2675) 5575,2675 v1(5625,2625) ; v1(5530,2800) 5835,3105 P4.11 ; v1(5892.5,2562.5) 5890,2560 5945,2505 P4.23
DGND: 3.3V.C "DSP JTAG.4" "DSP JTAG.6" "DSP JTAG.8" "DSP JTAG.10" "DSP JTAG.12" C1.2 C2.2 C3.2 C4.1 C6.2 C7.2 C8.2 C9.2 C10.2 C11.2 C12.2 C13.2 C14.2 C15.2 C16.2 C17.2 C18.2 C19.2 C20.2 C21.2 C22.2 C23.2 C24.2 C25.2 C26.2 C27.2 C28.2 C29.2 C30.2 C31.2 C32.2 C33.2 C34.2 C35.2 D2.1 P1.3 P1.4 P2.5 P2.SHD P3.3 P4.6 P4.18 P4.30 P4.42 pad.0 R2.1 R11.2 R13.2 RX.C S1.1 S1.2 TX.C U1.29 U1.30 U1.31 U1.34 U1.38 U1.39 U1.40 U1.41 U1.42 U1.43 U1.44 U1.45 U1.46 U1.47 U1.48 U1.49 U1.52 U1.56 U1.57 U1.58 U1.59 U1.60 U1.122 U1.177 U2.4 U2.8 U3.5 U4.2 U5.7 U5.18 U5.21 U5.25 U5.26 U6.2 U6.3 U6.5 | length 3023.6
  Top Layer w10: v1(3915,2360) 3920.43,2365.43 U5.18
  Ground w10: v2(4658.39,2315.08) v2(4658.39,2358.39) v2(4658.39,2401.69) v2(4658.39,2445) v2(4658.39,2488.31) v2(4658.39,2531.61) v2(4658.39,2574.92) ; v2(4701.69,2315.08) v2(4701.69,2358.39) v2(4701.69,2401.69) v2(4701.69,2445) v2(4701.69,2488.31) v2(4701.69,2531.61) v2(4701.69,2574.92) ; v2(4745,2315.08) v2(4745,2358.39) v2(4745,2401.69) v2(4745,2445) v2(4745,2488.31) v2(4745,2531.61) v2(4745,2574.92) ; v2(4788.31,2315.08) v2(4788.31,2358.39) v2(4788.31,2401.69) v2(4788.31,2445) v2(4788.31,2488.31) v2(4788.31,2531.61) v2(4788.31,2574.92) ; v2(4831.61,2315.08) v2(4831.61,2358.39) v2(4831.61,2401.69) v2(4831.61,2445) v2(4831.61,2488.31) v2(4831.61,2531.61) v2(4831.61,2574.92)
  Bottom Layer w10: v1(4300,2490) 4300,2446.5 C18.2 C19.2 ; C22.2 v1(4380,2275) C23.2 4458.5,2236.5 4540,2155 4670,2155 4686.5,2171.5 C32.2 C33.2 ; C14.2 C15.2 ; C28.2 C29.2 ; C12.2 C13.2 ; C20.2 C21.2 ; C16.2 C17.2
  other v1: 5160,2290 5525,2335 5125,2440 5400,2480 4350,2610 5120,2610 4735,2680
  other v2: 4615.08,2315.08 4874.92,2315.08 4615.08,2358.39 4874.92,2358.39 4615.08,2401.69 4874.92,2401.69 4615.08,2445 4874.92,2445 4615.08,2488.31 4874.92,2488.31 4615.08,2531.61 4874.92,2531.61 4615.08,2574.92 4874.92,2574.92
EMU0_DSP: "DSP JTAG.13" R7.2 | length 567.6
  Top Layer w10: 4410,3585 4460,3535 4460,3445 4505,3400 4655,3400 4771.5,3283.5 R7.2
EMU1_DSP: "DSP JTAG.14" R6.2 | length 281.2
  Top Layer w10: 4410,3485 4410,3378.5 R6.2
EOC1: P4.12 U1.160 | length 2294
  Top Layer w10: U1.160 4289.45,2336.73 4420,2467.28 4420,2652.28 4592.72,2825 v1(4925,2825) ; v1(6000,3055) 6010,3055 6060,3105 P4.12
  Bottom Layer w10: v1(4925,2825) 5250,2825 5300,2775 5550,2775 5830,3055 v1(6000,3055)
EOC2: P4.24 U1.161 | length 2312.2
  Top Layer w10: U1.161 4290.98,2317.05 4435,2461.07 4435,2646.07 4588.93,2800 v1(4900,2800) ; v1(5725,2750) 5815,2660 5985,2660 6015,2630 v1(6020,2630)
  Bottom Layer w10: v1(4900,2800) 5240,2800 5290,2750 v1(5725,2750) ; v1(6020,2630) 6020,2535 6050,2505 P4.24
EOC3: P4.36 U1.162 | length 2776.7
  Top Layer w10: U1.162 4292.51,2297.36 4450,2454.85 4450,2639.85 4585.15,2775 v1(4875,2775) ; v1(5700,2325) 5700,2245 5875,2070 v1(5875,2030)
  Bottom Layer w10: v1(4875,2775) 5225,2775 5275,2725 5650,2725 5700,2675 v1(5700,2325) ; v1(5875,2030) 5875,2015 5930,1960 6015,1960 P4.36
EOC4: P4.48 U1.163 | length 3323.1
  Top Layer w10: U1.163 4294.04,2277.68 4465,2448.64 4465,2633.64 4581.36,2750 v1(4850,2750) ; v1(5675,2275) 5675,2025 v1(5700,2000)
  Bottom Layer w10: v1(4850,2750) 5210,2750 5260,2700 5645,2700 5675,2670 v1(5675,2275) ; v1(5700,2000) 5700,1805 5945,1560 5990,1560 6020,1530 6020,1355 P4.48
Net3.3V_A: 3.3V.A R15.2 | length 196.2
  Top Layer w20: 3.3V.A R15.2
NetC4_2: C4.2 U2.5 | length 438.4
  Top Layer w10: C4.2 4271.5,1713.5 4350,1635 4350,1400 4330,1380 U2.5
NetC5_1: C5.1 R12.2 R13.1 U2.6 | length 718.7
  Top Layer w10: U2.6 4335,1330 4370,1365 4370,1560 4441.5,1631.5 R12.2
  Top Layer w20: C5.1 R12.2 R13.1
NetD1_2: D1.2 R1.2 | length 112.4
  Top Layer w10: R1.2 4212.4,3500.91 D1.2
NetD2_2: D2.2 R8.2 | length 121.1
  Top Layer w10: R8.2 D2.2
NetR8_1: R8.1 U1.71 | length 203.1
  Top Layer w10: U1.71 5247.4,2535 R8.1
NetR9_2: R9.2 U2.2 | length 498.7
  Top Layer w10: R9.2 v1(3850,1475) ; v1(4125,1500) 4155,1530 U2.2
  Bottom Layer w10: v1(3850,1475) 4100,1475 v1(4125,1500)
NetR10_2: R10.2 R11.1 U2.3 | length 771.4
  Top Layer w10: R11.1 R10.2 v1(3733.5,1305) ; v1(4085,1395) 4170,1480 U2.3
  Bottom Layer w10: v1(3733.5,1305) 3995,1305 v1(4085,1395)
NetR14_2: R14.2 U3.1 | length 521.3
  Top Layer w10: v1(5275,1425) 5275,1343.5 R14.2 ; U3.1 5371.42,1678.58 5415,1635 v1(5415,1580)
  Bottom Layer w10: v1(5275,1425) 5360,1425 5415,1480 v1(5415,1580)
NetR16_2: R16.2 U4.3 | length 129.3
  Top Layer w10: R16.2 4067.4,1625.91 U4.3
NetR17_2: R17.2 U5.19 | length 645.2
  Top Layer w10: R17.2 3843.5,2790 3843.5,2471.5 3923.98,2391.02 U5.19
NetR19_2: R19.2 TX.A | length 121.7
  Top Layer w10: TX.A 3746.5,2039.02 R19.2
NetR20_2: R20.2 RX.A | length 120.4
  Top Layer w10: R20.2 3511.5,2035.98 RX.A
RS485-A: P3.1 R18.2 U6.6 | length 340.4
  Top Layer w10: v1(3985,3080) R18.2@4028.5,3080
  Bottom Layer w10: P3.1 3795,3145 3860,3080 U6.6 v1(3985,3080)
RS485-B: P3.2 R18.1 U6.7 | length 339.9
  Top Layer w10: P3.2 3776.26,3066.26 3840,3130 v1(3860,3130) ; v1@3986.5,3136.5 R18.1
  Bottom Layer w10: v1(3860,3130) U6.7 ; U6.7@3933.7,3135 v1(3985,3135)
SPIA_MISO: P4.7 P4.19 U1.9 | length 2975
  Top Layer w10: U1.9 4479.25,2030.47 4573.79,2125 v1(5000,2125) ; v1(5620,3070) 5620,3055 P4.19
  Bottom Layer w10: v1(5000,2125) 5665,2125 5850,2310 5850,2585 P4.19 ; v1(5620,3070) 5855,3305 P4.7
SPIA_MOSI: P4.10 P4.22 U1.8 | length 2667.2
  Top Layer w10: U1.8 4459.57,2031.99 4577.57,2150 v1(5025,2150) ; v1(5780,2300) 5780,2301.82 5755,2326.82 5755,2353.79 5765,2363.79 5765,2380.36 5779.64,2395 5796.21,2395 5956.21,2555 6020,2555 P4.22 6070,2625 6025,2670 v1(6025,2740)
  Bottom Layer w10: v1(5025,2150) 5650,2150 5780,2280 v1(5780,2300) ; v1(6025,2740) 6025,3170 6060,3205 P4.10
SPIA_SCK: P4.8 P4.20 U1.10 | length 3182.5
  Top Layer w10: U1.10 4498.94,2028.94 4570,2100 v1(4975,2100) ; v1(5680,3055) 5870,2865 5870,2845 5950,2765 6045,2765 6070,2740 P4.20
  Bottom Layer w10: v1(4975,2100) 5690,2100 5865,2275 5865,2575 5945,2655 6020,2655 P4.20 ; v1(5680,3055) 5675,3055 5875,3255 6020,3255 P4.8
SPIB_MISO: P4.31 P4.43 U1.25 | length 2004.3
  Top Layer w10: U1.25 4794.21,1989.21 4830,2025 v1(4970,2025)
  Bottom Layer w10: v1(4970,2025) 5450,2025 ; P4.43 5450,2025 ; P4.31 5845,2105 5765,2025 5450,2025
SPIB_MOSI: P4.34 P4.46 U1.24 | length 2049.1
  Top Layer w10: U1.24 4774.53,2029.53 4795,2050 v1(4925,2050) ; v1(5750,2050) v1(5840,2050) ; P4.46 6030.47,1444.53 6030.47,1965.47 P4.34
  Bottom Layer w10: v1(4925,2050) v1(5750,2050) ; v1(5840,2050) 5850,2050 5860,2060 6015,2060 P4.34
SPIB_SCK: P4.32 P4.44 U1.22 | length 2136.1
  Top Layer w10: U1.22 4735.16,2030.16 4780,2075 v1(4950,2075) ; P4.44 6070,1549.1 6109.53,1588.63 6109.53,2089.53 6094.06,2105 P4.32
  Bottom Layer w10: v1(4950,2075) 5765,2075 5840,2150 6025,2150 P4.32
SPIC_CE: P4.1 P4.13 P4.25 P4.37 U1.97 | length 3631.4
  Top Layer w10: U1.97 5010.75,3060.75 v1(5050,3100) ; v1(5125,3175) 5485,3175 ; v1(5845,1965) 5854.64,1965 5869.64,1980 5875,1980 5900,2005 5900,2125 5825,2200 5825,2295 5790,2330 v1(5790,2370) 5800,2380 5945,2380 P4.25 ; P4.13 5800,3175 5485,3175 ; P4.1 5915,3605 5485,3175
  Bottom Layer w10: v1(5050,3100) v1(5125,3175) ; v1(5790,2370) 5755,2405 5755,2885 5875,3005 P4.13 ; v1(5845,1965) 5820,1940 5820,1830 5845,1805 P4.37
SPIC_MOSI: P4.4 P4.16 P4.28 P4.40 U1.94 | length 3149.5
  Top Layer w10: U1.94 5069.8,3014.8 v1(5100,3045) ; v1(5180,3125) 5660,3125 5930,2855 6020,2855 P4.16
  Bottom Layer w10: v1(5100,3045) v1(5180,3125) ; P4.40 6110,1745 6110,2265 P4.28 6110,2345 6110,2870 6075,2905 P4.16 6110,2945 6110,3465 P4.4
SPIC_SCK: P4.3 P4.15 P4.27 P4.39 U1.96 | length 3463.1
  Top Layer w10: U1.96 5030.43,3030.43 v1(5075,3075) ; v1(5150,3150) v1(5340,3150) 5725,3150 P4.15 ; v1@5825,2347.5 5867.5,2305 ; v1(5880,1880) 5880,1795 P4.39 ; v1(5880,1955) 5920,1995 5920,2155 5867.5,2207.5 5867.5,2305 ; P4.27 5867.5,2305
  Bottom Layer w10: v1(5075,3075) v1(5150,3150) ; v1(5340,3150) 5340,3185 5565,3410 5755,3410 5850,3505 P4.3 ; v1(5825,2350) 5825,2395 5780,2440 5780,2715 P4.15 ; v1(5880,1880) v1(5880,1955)
T\R\S\T\_DSP: "DSP JTAG.2" R2.2 U1.79 | length 1101.2
  Top Layer w10: R2.2 4926.5,3260 4936.5,3250 v1(4970,3250) ; v1(4980,2870) 5158.94,2691.06 U1.79
  Bottom Layer w10: v1(4980,2870) 4975,2875 4975,3245 v1(4970,3250) 5020,3250 5060,3290 5060,3435 5010,3485
TCK_DSP: "DSP JTAG.9" "DSP JTAG.11" U1.81 | length 1422.3
  Top Layer w10: 4510,3585 4610,3585 4660,3535 4660,3440 4765,3335 4937.57,3335 5005,3267.57 5005,3185 5325,2865 5325,2745 5310.43,2730.43 U1.81
TDI_DSP: "DSP JTAG.3" U1.77 | length 1291.5
  Top Layer w10: 4910,3585 4965,3530 4965,3350 5050,3265 5050,3206.21 5425,2831.21 5425,2710 5366.69,2651.69 U1.77
TDO_DSP: "DSP JTAG.7" U1.78 | length 1379.9
  Top Layer w10: 4710,3585 4715,3585 4760,3540 4760,3450 4815,3395 4898.79,3395 5025,3268.79 5025,3210 5400,2835 5400,2715 5356.38,2671.38 U1.78
TMS_DSP: "DSP JTAG.1" U1.80 | length 1109
  Top Layer w10: 5010,3585 5085,3510 v1(5085,3430) ; U1.80 5325.75,2710.75 5355,2740 v1(5355,2835)
  Bottom Layer w10: v1(5085,3430) 5085,3265 5355,2995 v1(5355,2835)
UART1_RX: R19.1 U1.19 U5.1 | length 1739.8
  Top Layer w10: R19.1 3683.5,2198.5 3720,2235 3785,2235 ; U5.1 3783.66,2621.34 3825,2580 3825,2275 3785,2235 ; U1.19 4676.1,1904.89 4631.21,1860 4170,1860 3795,2235 3785,2235
UART1_TX: R20.1 U1.18 U5.5 | length 1921.1
  Top Layer w10: R20.1@3450,2156.5 v1(3450,2220) ; v1(3650,2515) 3653.98,2518.98 U5.5 ; v1(4150,1925) 4200,1875 4625,1875 4656.42,1906.42 U1.18
  Bottom Layer w10: v1(3650,2515) 3450,2315 v1(3450,2220) 3745,1925 v1(4150,1925)
UART2_RX: U1.100 U6.1 | length 1027.5
  Top Layer w10: v1(4425,3280) 4520,3185 v1(4670,3185) ; v1(4750,3070) 4775,3045 4865,3045 4880,3030 4905,3030 4951.69,2983.31 U1.100
  Bottom Layer w10: U6.1 4245,3180 4345,3280 v1(4425,3280) ; v1(4670,3185) 4750,3105 v1@4750,3075
UART2_TX: U1.98 U6.4 | length 1154
  Top Layer w10: v1(4385,3240) 4425,3240 4515,3150 4915,3150 4991.06,3073.94 U1.98
  Bottom Layer w10: U6.4 4160,3030 4200,3070 4200,3105 4335,3240 v1(4385,3240)
USB_N: P2.2 U5.16 | length 506.5
  Top Layer w10: P2.2 3564.59,2475 v1(3660,2475) ; v1@3860,2361.11 v1(3860,2365) 3910,2315 3999.08,2315 U5.16
  Bottom Layer w10: v1(3660,2475) 3750,2475 v1(3860,2365)
USB_P: P2.3 U5.15 | length 500.8
  Top Layer w10: P2.3 v1(3630,2450) ; v1(3865,2315) 3890,2290 U5.15@3998.49,2290
  Bottom Layer w10: v1(3630,2450) 3730,2450 v1(3865,2315)
VFUSED: C2.1 C3.1 F1.2 R9.1 R10.1 U2.1 | length 1397.7
  Top Layer w20: F1.2@3515,1630 3595,1550 ; R10.1 3796.5,1388.5 3733.5,1451.5 R9.1 3670,1475 3595,1550 ; C3.1 3915,1490 3855,1550 ; C2.1 C3.1@3915.79,1474.21 ; U2.1 4140,1580 4110,1550 3855,1550 ; 3595,1550 3855,1550
VIN: F1.1 P3.4 | length 1497.2
  Top Layer w20: F1.1 3720.67,1895.67 v1(3820,1995)
  Bottom Layer w20: P3.4 3791.22,2908.78 4000,2700 4000,2175 v1(3820,1995)
X\R\S\: C1.1 D1.1 R4.2 S1.3 S1.4 U1.124 | length 1655.1
  Top Layer w10: S1.4 3890,3607.17 ; R4.2 C1.1 ; D1.1 3999.02,3605 S1.3 3890,3607.17 ; U1.124 4479.25,3140.75 4415,3205 4023.5,3205 C1.1 ; 3890,3607.17 3890,3338.5 C1.1
pads on no net: P2.1 P2.4 U1.6 U1.7 U1.12 U1.13 U1.14 U1.17 U1.23 U1.27 U1.28 U1.32 U1.33 U1.35 U1.37 U1.50 U1.51 U1.53 U1.55 U1.63 U1.64 U1.65 U1.66 U1.67 U1.69 U1.70 U1.73 U1.74 U1.83 U1.84 U1.85 U1.86 U1.87 U1.89 U1.90 U1.92 U1.93 U1.95 U1.101 U1.102 U1.103 U1.104 U1.105 U1.107 U1.108 U1.109 U1.110 U1.111 U1.112 U1.113 U1.115 U1.118 U1.121 U1.123 U1.128 U1.129 U1.130 U1.131 U1.132 U1.133 U1.134 U1.135 U1.136 U1.140 U1.141 U1.142 U1.143 U1.144 U1.145 U1.146 U1.148 U1.149 U1.150 U1.151 U1.155 U1.156 U1.157 U1.165 U1.166 U1.167 U1.170 U1.171 U1.172 U1.173 U1.174 U1.175 U1.176 U3.2 U4.4 U5.2 U5.3 U5.6 U5.8 U5.9 U5.10 U5.11 U5.12 U5.13 U5.14 U5.17 U5.22 U5.23 U5.24 U5.27 U5.28

## Polygon pours and split planes (outlines as drawn)
3.3VD on Power "3.3VD" (solid, remove dead copper, pour order 0): 3375,3675 6120,3675 6120,1215 3375,1215
DGND on Ground "DGND" (solid, remove dead copper, pour order 2): 3380,3665 6115,3665 6115,1225 3380,1225 3380,3665
DGND on Bottom Layer "DGND" (solid, remove dead copper, pour order 6): 3380,3665 6115,3665 6115,1225 3380,1225 3380,3665
1.2VD on Bottom Layer "1.2VD" (solid, remove dead copper, pour order 4): 5290,1990 4200,1990 4205,1995 4205,2895 5290,2895
DGND on Top Layer "DGND" (solid, remove dead copper, pour order 8): 3380,3665 6115,3665 6115,1225 3380,1225 3380,3665

## Keep-outs
Keep-Out Layer:
  the board outline again, w10

## Silkscreen, mask and mechanical layers (free items; w line width, h text height)
Top Overlay:
  lines w10: 3370,3675 6125,3675
  text "A" at 3830,3115 h60
  text "B" at 3830,3040 h60
  text "GND" at 3830,2965 h60
  text "24V" at 3830,2890 h60
  text "Passive SONAR / Designer: Jake Easterling" at 5895,1710 h60 r90